# Altium PCB TruckCape for Hammond 1455K - Rev3.PcbDoc
Units mil, origin at the board's own origin, x right, y up, seen from the top; angles counter-clockwise.
Board outline 2952.76 x 4725.19 mil, 2 copper layers (Component Side, Bottom Layer), stack 12.8 mil thick; 37 components, 40 nets, 264 pads, 16 vias.
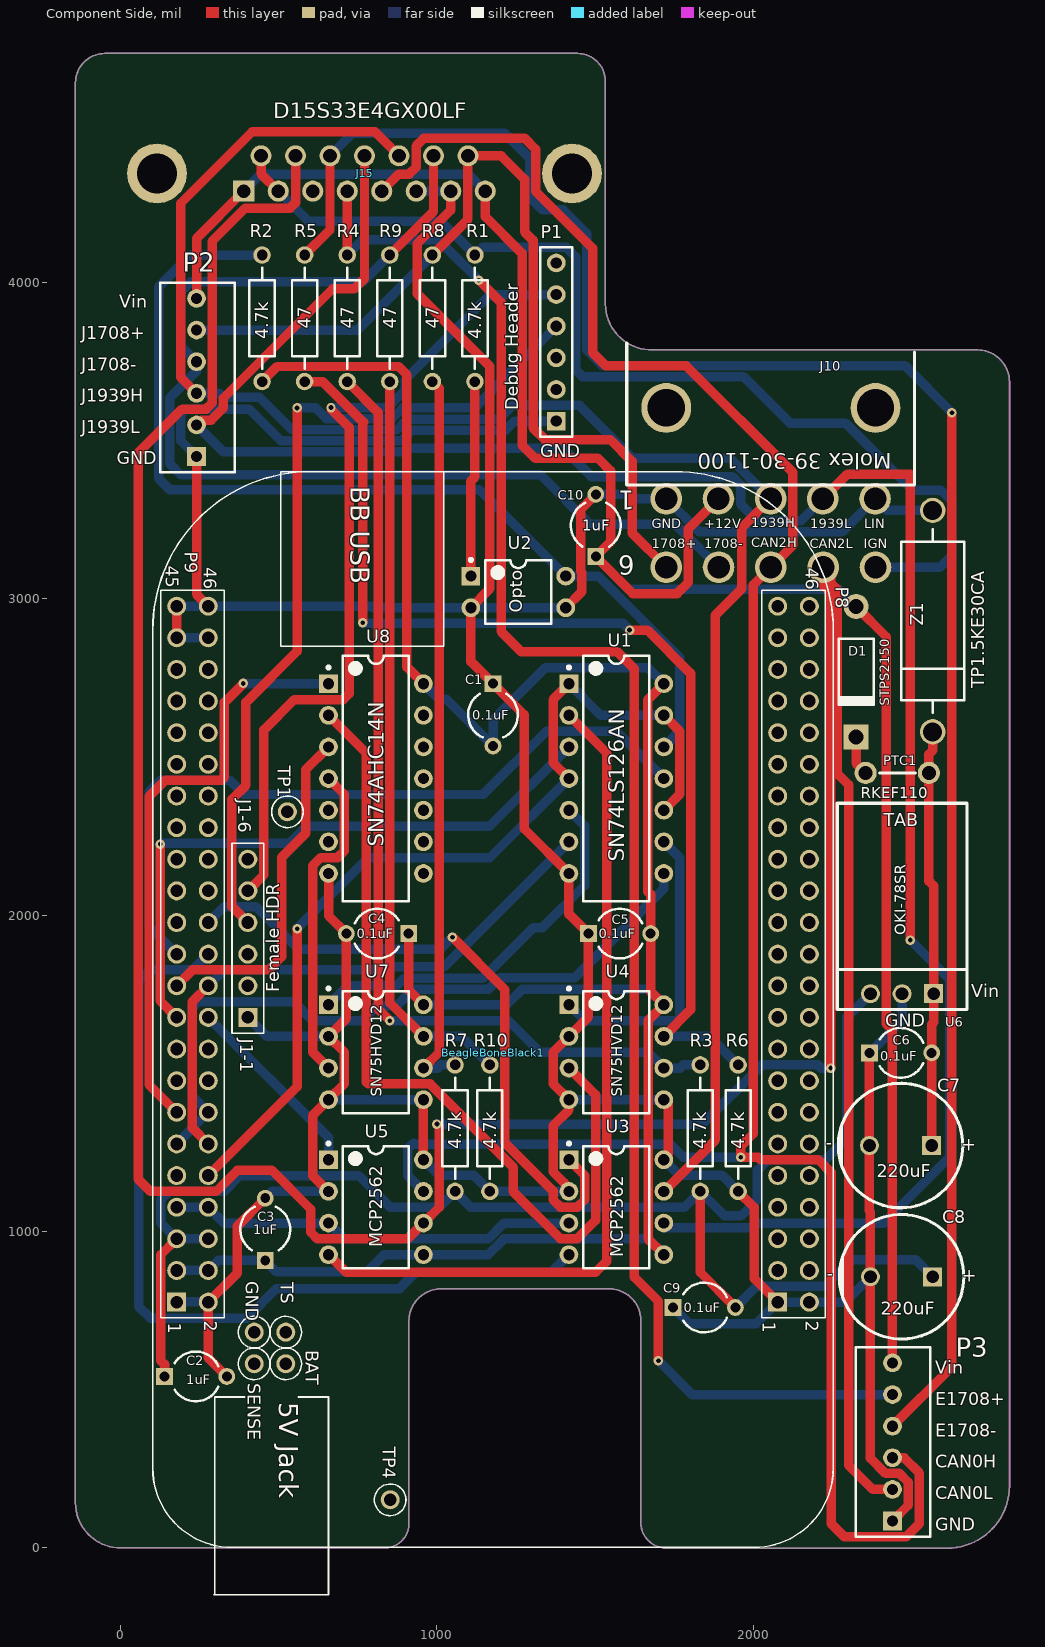
[diagram p0: Component Side view]
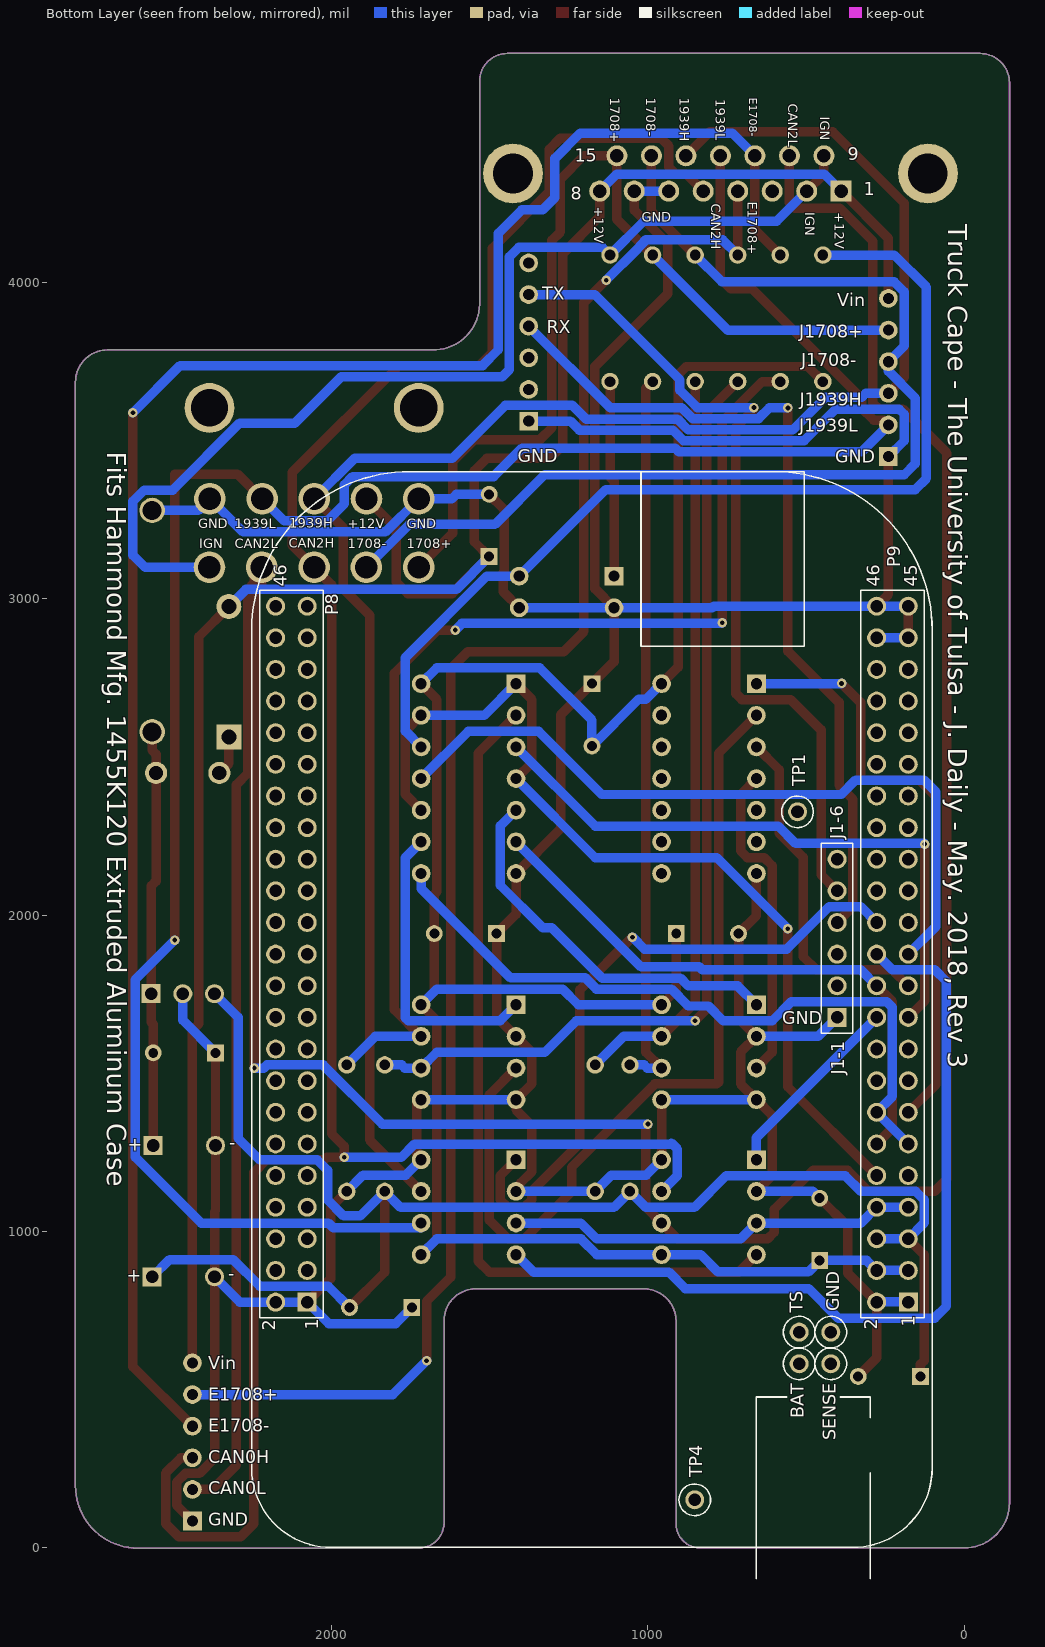
[diagram p1: Bottom Layer view, seen from below]

## Layer stack, top to bottom
Top Solder: solder mask 0.4, Solder Resist, Dk 3.5
Component Side: signal copper 1.4
Dielectric 1: core 10, FR-4, Dk 4.2
Bottom Layer: signal copper 1.4
Solder Side: solder mask 0.4, Solder Resist, Dk 3.5

## Board outline
0.17,0 cw(c0.17,143.03) -142.87,143.03 -142.87,4631.31 cw(c-49.77,4631.31) -49.77,4724.41 1444.44,4724.41 cw(c1444.44,4636.71) 1532.13,4636.71 1532.13,3931.45 1532.15,3931.45 ccw(c1678.95,3933.94) 1681.44,3787.14 1681.45,3787.13 2708.81,3787.13 cw(c2708.5,3685.75) 2809.89,3685.44 2809.89,196.07 cw(c2613.04,196.07) 2613.04,-0.78 1725.78,-0.78 cw(c1725.78,80.77) 1644.23,80.77 1644.23,719.01 ccw(c1544.23,719.01) 1544.23,819.01 1013.23,819.01 ccw(c1013.17,717.07) 911.23,717.13 911.23,76.23 cw(c835,76.23) 835,0

## Design rules (kind name [scope] priority, off if disabled: settings)
Clearance [All] p1: gap=5 ignorepadtopadclearanceinfootprint=FALSE except(0: Arc-Hole Track-Hole SMDPad-Hole THPad-Hole Via-Hole Fill-Hole Poly-Hole Region-Hole Text-Hole)
PolygonConnect [All] p1: connectstyle=Relief reliefconductorwidth=10 reliefentries=4 polygonreliefangle="90 Angle" airgapwidth=10
RoutingVias [All] p1: holewidth=15 width=30 viastyle="Through Hole" minholewidth=13 minwidth=20 maxholewidth=20 maxwidth=30
SolderMaskExpansion [All] p1: expansion=4
Width [All] p1: maxlimit=100 minlimit=10 preferedwidth=30 minimp=50.000000 maximp=50.000000 favimp=50.000000
30 further rules are at their usual default settings.

## Components (designator, comment, footprint, x,y, rotation, side; value= is the part's Value field where it differs from the comment)
BeagleBoneBlack1 "BeagleBoneBlack" Beagleboneblack -332.87,1530.63 r270 top locked
C1 "0.1uF" CAPR5-4X5 1177.13,2633.71 r270 top
C2 "1uF" CAPR5-4X5 237.13,542.13 r0 top
C3 "1uF" CAPR5-4X5 457.13,1007.13 r90 top
C4 "0.1uF" CAPR5-4X5 812.13,1942.13 r180 top
C5 "0.1uF" CAPR5-4X5 1577.13,1942.13 r0 top
C6 "0.1uF" CAPR5-4X5 2465.56,1565 r0 top
C7 "220uF" "Elec. Cap 5 x 10mm" 2563.98,1272.13 r180 top
C8 "220uF" "Elec. Cap 5 x 10mm" 2567.13,857.13 r180 top
C9 "0.1uF" CAPR5-4X5 1845,760 r0 top
C10 "1uF" CAPR5-4X5 1502.13,3232.13 r90 top
D1 "STPS2150" DO-41 2325,2770 r270 top
J10 "10 Pos Mini-Fit Jr." "10 pos Mini-Fit Jr. R/A Header" 1724.82,3316.61 r180 top locked
J15 "Vehicle Interface Cable Connector" DB15 771.91,4401.02 r0 top
P1 "Use this part in J1-1 to J1-6" HDR1X6 1377.13,3562.13 r90 top
P2 "Terminal Block" HDR1X6 240,3450 r90 top
P3 "Terminal Block" HDR1X6 2440,85 r90 top
PTC1 "RKEF110" PTC 2480,2450 r0 top
R1 "4.7k" Axial-0.4 1120,3887.13 r270 top
R2 "4.7k" Axial-0.4 447.13,3887.13 r90 top
R3 "4.7k" Axial-0.4 1832.13,1327.13 r270 top
R4 "47" Axial-0.4 716.28,3887.13 r90 top
R5 "47" Axial-0.4 581.71,3887.13 r90 top
R6 "4.7k" Axial-0.4 1952.13,1327.13 r270 top
R7 "4.7k" Axial-0.4 1057.13,1327.13 r270 top
R8 "47" Axial-0.4 985.43,3887.13 r90 top
R9 "47" Axial-0.4 850.85,3887.13 r90 top
R10 "4.7k" Axial-0.4 1167.13,1327.13 r270 top
U1 "SN74LS126AN" N14A 1567.13,2432.13 r0 top locked
U2 "Opto" DIP-4 1257.13,3022.13 r0 top
U3 "MCP2562" PDIP300-P8 1567.13,1077.13 r0 top locked
U4 "SN75HVD12" PDIP300-P8 1567.13,1567.13 r0 top locked
U5 "MCP2562" PDIP300-P8 807.13,1077.13 r0 top locked
U6 "OKI-78SR" OKI-78SR 2370.28,1752.13 r0 top
U7 "SN75HVD12" PDIP300-P8 807.13,1567.13 r0 top locked
U8 "SN74AHC14N" N14A 807.13,2432.13 r0 top locked
Z1 "TP1.5KE30CA" DIODE-0.7 2567.13,2930 r270 top

## Footprints (in the part's own frame and the unit in brackets; to place one, negate y for a bottom-side part, rotate by r counter-clockwise, add the part's x,y. Pads: shape width x height; smd on the part's side, far side on the other; paste and mask are expansions set on the pad)
"10 pos Mini-Fit Jr. R/A Header" [mil] "Molex 10 position Mini-Fit Jr. Right Angle Header with Pegs, Series 5569"
  round 157.48 hole 118.11: 0(-661.42,-287.4) 0(0,-287.4)
  round 100 hole 71: 1(0,0) 2(-165,0) 3(-330,0) 4(-495,0) 5(-660,0) 6(0,216.53) 7(-165.36,216.53) 8(-330.71,216.53) 9(-496.06,216.53) 10(-661.42,216.53)
  silkscreen extent -785,-491 125,-43
Axial-0.4 [mm] "Axial Device, Thru-Hole; 2 Leads; 0.4 in Pin Spacing"
  round 1.4 hole 0.85: 1(-5.08,0) 2(5.08,0)
  silkscreen extent -4.06,-1.02 4.06,1.02
Beagleboneblack [mil] "Flipped Headers, testpoints and Overlay for a BBB Rev C"
  rect 60x60 hole 40 mask+2: 1(753.5,510) J1-1(-146.5,735) P1(753.5,2410)
  round 60 hole 40 mask+2: 2(753.5,610) 3(653.5,510) 4(653.5,610) 5(553.5,510) 6(553.5,610) 7(453.5,510) 8(453.5,610) 9(353.5,510) 10(353.5,610) 11(253.5,510) 12(253.5,610) 13(153.5,510) 14(153.5,610) 15(53.5,510) 16(53.5,610) 17(-46.5,510) 18(-46.5,610) 19(-146.5,510) 20(-146.5,610) 21(-246.5,510) 22(-246.5,610) 23(-346.5,510) 24(-346.5,610) 25(-446.5,510) 26(-446.5,610) 27(-546.5,510) 28(-546.5,610) 29(-646.5,510) 30(-646.5,610) 31(-746.5,510) 32(-746.5,610) 33(-846.5,510) 34(-846.5,610) 35(-946.5,510) 36(-946.5,610) 37(-1046.5,510) 38(-1046.5,610) 39(-1146.5,510) 40(-1146.5,610) 41(-1246.5,510) 42(-1246.5,610) 43(-1346.5,510) 44(-1346.5,610) 45(-1446.5,510) 46(-1446.5,610) J1-2(-246.5,735) J1-3(-346.5,735) J1-4(-446.5,735) J1-5(-546.5,735) J1-6(-646.5,735) P2(753.5,2510) P3(653.5,2410) P4(653.5,2510) P5(553.5,2410) P6(553.5,2510) P7(453.5,2410) P8(453.5,2510) P9(353.5,2410) P10(353.5,2510) P11(253.5,2410) P12(253.5,2510) P13(153.5,2410) P14(153.5,2510) P15(53.5,2410) P16(53.5,2510) P17(-46.5,2410) P18(-46.5,2510) P19(-146.5,2410) P20(-146.5,2510) P21(-246.5,2410) P22(-246.5,2510) P23(-346.5,2410) P24(-346.5,2510) P25(-446.5,2410) P26(-446.5,2510) P27(-546.5,2410) P28(-546.5,2510) P29(-646.5,2410) P30(-646.5,2510) P31(-746.5,2410) P32(-746.5,2510) P33(-846.5,2410) P34(-846.5,2510) P35(-946.5,2410) P36(-946.5,2510) P37(-1046.5,2410) P38(-1046.5,2510) P39(-1146.5,2410) P40(-1146.5,2510) P41(-1246.5,2410) P42(-1246.5,2510) P43(-1346.5,2410) P44(-1346.5,2510) P45(-1446.5,2410) P46(-1446.5,2510) TP1(-796.5,860) TP4(1378.5,1185) TP5(948.5,855) TP6(948.5,755) TP7(848.5,855) TP8(848.5,755)
  silkscreen extent -1872,434 1678,2586
CAPR5-4X5 [mm] "Capacitor; 2 Leads"
  rect 1.35x1.35 hole 0.8: 1(-2.5,0)
  round 1.35 hole 0.8: 2(2.5,0)
  silkscreen extent -1.69,-2 1.82,2
DB15 [mm]
  rect 1.69x1.69 hole 1.09: 1(-9.72,-2.843)
  round 1.69 hole 1.09: 2(-6.95,-2.843) 3(-4.18,-2.843) 4(-1.41,-2.843) 5(1.36,-2.843) 6(4.13,-2.843) 7(6.9,-2.843) 8(9.67,-2.843) 9(-8.335,-0.003) 10(-5.565,-0.003) 11(-2.795,-0.003) 12(-0.025,-0.003) 13(2.745,-0.003) 14(5.515,-0.003) 15(8.285,-0.003)
  round 4.8 hole 3.18: 16(-16.685,-1.423) 17(16.635,-1.423)
DIODE-0.7 [mil] "Diode, Thru-Hole; 2 Leads; 0.7 in Pin Spacing"
  round 80 hole 60: 1(-350,0) 2(350,0)
  silkscreen extent -290,-100 290,100
DIP-4 [mm] "DIP; 4 Leads; Row Spacing 7.62 mm; Pitch 2.54 mm"
  rect 1.5x1.5 hole 0.9: 1(-3.81,1.27)
  round 1.5 hole 0.9: 2(-3.81,-1.27) 3(3.81,-1.27) 4(3.81,1.27)
  silkscreen extent -3.93,-2.55 2.65,2.69, body extent -3.15,-2.5 3.15,2.5, height 5.6
DO-41 [mm] "Diode, Axial; Body 5.2 x 2.7 mm (LxDia. max), Lead Dia. 0.86 mm (max)"
  round 2 hole 1.2: 1(-5.23,0)
  rect 2x2 hole 1.2: 2(5.23,0)
  silkscreen extent -2.65,-1.4 2.75,1.4
"Elec. Cap 5 x 10mm" [mil] "2 lead polarized Radial Capacitor with 5 mm lead spacing and 10 mm diameter can"
  rect 60x60 hole 40: 1(0,0)
  round 60 hole 40: 2(196.85,0)
  silkscreen extent -98,-197 295,197
HDR1X6 [mm] "Connector; Header; 6 Position"
  rect 1.5x1.5 hole 0.9: 1(0,0)
  round 1.5 hole 0.9: 2(2.54,0) 3(5.08,0) 4(7.62,0) 5(10.16,0) 6(12.7,0)
  silkscreen extent -1.27,-1.27 13.97,1.27
N14A [mm] "DIP, 14-Leads, Row Spacing 7.62mm, Pitch 2.54mm, Body 19.18x6.35mm"
  rect 1.5x1.5 hole 0.9: 1(-3.81,7.62)
  round 1.5 hole 0.9: 2(-3.81,5.08) 3(-3.81,2.54) 4(-3.81,0) 5(-3.81,-2.54) 6(-3.81,-5.08) 7(-3.81,-7.62) 8(3.81,-7.62) 9(3.81,-5.08) 10(3.81,-2.54) 11(3.81,0) 12(3.81,2.54) 13(3.81,5.08) 14(3.81,7.62)
  silkscreen extent -3.93,-9.85 2.65,9.85, body extent -3.55,-9.85 3.55,9.85, height 5.08
OKI-78SR [mil] "Horizontal Mount SIP DC/DC Converter"
  rect 60x60 hole 40: 1(200,0)
  round 60 hole 40: 2(100,0) 3(0,0)
  silkscreen extent -105,-50 305,602
PDIP300-P8 [mm] "DIP, 8-Leads, Row Spacing 7.62mm, Pitch 2.54mm, Body 9.5x6.6mm"
  rect 1.5x1.5 hole 0.9: 1(-3.81,3.81)
  round 1.5 hole 0.9: 2(-3.81,1.27) 3(-3.81,-1.27) 4(-3.81,-3.81) 5(3.81,-3.81) 6(3.81,-1.27) 7(3.81,1.27) 8(3.81,3.81)
  silkscreen extent -3.93,-4.9 2.65,5.23, body extent -3.55,-4.9 3.55,4.9, height 4.32
PTC [mil] "TE RGEF600-2"
  round 70 hole 45: 1(-125,0) 2(75,0)
  silkscreen extent -80,0 33,0

## Part data
BeagleBoneBlack1: "46 Positions Header, Breakaway Connector 0.100\" (2.54mm) Through Hole Tin", Manufacturer="Sullins Connector Solutions", PartNumber=PREC023DAAN-RC, Supplier Part Number 1=S2012EC-23-ND, Supplier 1=Digi-Key
C1 C4 C5 C6 C9: library part Cap, "CAP CER 0.1UF 100V X7R RADIAL", Manufacturer="Vishay BC Components", PartNumber=K104K20X7RH53H5, Supplier Part Number 1=BC5139-ND, Supplier 1=Digi-Key
C2 C3 C10: library part Cap, "CAP CER 1UF 100V X7R RADIAL", Manufacturer="Murata Electronics North America", PartNumber=RDER72A105K2M1H03A, Supplier Part Number 1=490-9198-1-ND, Supplier 1=Digi-Key
C7 C8: library part "Electrolytic Cap", "220µF 50V Aluminum Electrolytic Capacitors Radial, Can 175 mOhm @ 10kHz 5000 Hrs @ 105°C", Manufacturer="EPCOS (TDK)", PartNumber=B41858C6227M000, Supplier Part Number 1=495-6000-ND, Supplier 1=Digi-Key
D1: library part "Diode 1N4003", "Diode Schottky 150V 2A Through Hole DO-15", Manufacturer=STMicroelectronics, Supplier Part Number 1=497-3213-1-ND, PartNumber=STPS2150, Supplier 1=Digi-Key
J10: library part "10 Pos Header", "10 Positions Header Connector 0.165\" (4.20mm) Through Hole, Right Angle Tin", Manufacturer=Molex, PartNumber=39-30-1100, Supplier Part Number 1=WM1355-ND, Supplier 1=Digi-Key
J15: library part 788781-2, "Receptacle Assembly, 15 Position, Right Angle, 8.08mm Series, Amplimite, with Screwlocks", Manufacturer="Amphenol FCI", PartNumber=D15S33E4GX00LF, Supplier Part Number 1=609-1499-ND, Supplier 1=Digi-Key
P1: library part "Header 6", "CONN HEADER FEMALE 6POS .1\" GOLD", Manufacturer="Sullins Connector Solutions", PartNumber=PPPC061LFBN-RC, Supplier Part Number 1=S7039-ND, Supplier 1=Digi-Key
P2 P3: library part "Header 6", "6 Position Wire to Board Terminal Block Horizontal with Board 0.100\" (2.54mm) Through Hole", Manufacturer="TE Connectivity AMP Connectors", PartNumber=282834-6, Supplier Part Number 1=A98337-ND, Supplier 1=Digi-Key
PTC1: library part "SMD Resistor", "Polymeric PTC Resettable Fuse 60V 1.1A Ih Through Hole Radial, Disc", Manufacturer="Littelfuse Inc.", Supplier Part Number 1=RKEF110HF-ND, PartNumber=RKEF110, Supplier 1=Digi-Key
R1 R2 R3 R6 R7 R10: library part "Chip Resistor", "RES SMD 4.7K OHM 1% 1/10W 0603", Manufacturer=Yageo, PartNumber=CFR-25JB-52-4K7, Supplier Part Number 1=4.7KQBK-ND, Supplier 1=Digi-Key
R4 R5 R8 R9: library part "Chip Resistor", "47 Ohms ±5% 0.25W, 1/4W Through Hole Resistor Axial  Carbon Film", Manufacturer=Yageo, PartNumber=CFR-25JB-52-47R, Supplier Part Number 1=47QBK-ND, Supplier 1=Digi-Key
U1: library part DM74LS126AN, "Quad 3-State Buffer", Manufacturer="Texas Instruments", Supplier Part Number 1=296-3643-5-ND, ComponentLink1Description="Manufacturer Link", ComponentLink1URL=http://www.fairchildsemi.com/, DatasheetVersion=Mar-1998, LatestRevisionDate=29-May-2009, LatestRevisionNote="Component Body Added.", PackageDescription="DIP, 14-Pin, Row Spacing 7.62 mm, Pitch 2.54 mm", PackageReference=N14A, PackageVersion=2000, PartNumber=SN74LS126AN, Published=17-Jul-2002, Publisher="Altium Limited", Supplier 1=Digi-Key
U2: library part Optoisolator1, "4-Pin Phototransistor Optocoupler", DatasheetVersion=Nov-2003, LatestRevisionDate=04-Mar-2005, LatestRevisionNote="Sch pins 3 & 4 Swapped.", PackageReference=DIP-4, Published=24-Mar-1999, Publisher="Altium Limited"
U3 U5: library part SN65HVD232DR, "1/1 Transceiver Half CAN 8-PDIP", Drivers Per Package=1, Manufacturer="Microchip Technology", PartNumber=MCP2562-E/P, Rating=Catalog, Supplier Part Number 1=MCP2562-E/P-ND, Supply Voltage(s)(V)=3.3, Code_JEDEC=MS-012AA, ComponentLink1Description=Datasheet, ComponentLink1URL=http://www.ti.com/general/docs/lit/getliterature.tsp?genericPartNumber=SN65HVD232&fileType=pdf, DatasheetVersion=SLOS346K, Eco-Plan="Green (RoHS & no Sb/Br)", ICC(Max)(mA)=17, Isolated=No, Mounting Technology="Surface Mount", PackageDescription="8-Pin Plastic Small Outline Integrated Circuit, 4.9 x 3.9 mm, Pitch 1.27 mm Pitch", PackageReference=D8, PackageVersion="revM, Jun-2011", Receivers Per Package=1, SubFamily=CAN, Supplier 1=Digi-Key, Supplier 2=Digi-Key, Supplier 3=Digi-Key, Supplier 4=Newark, Supplier 5=Mouser, Supplier Part Number 2=296-26344-1-ND, Supplier Part Number 3=296-26344-6-ND, Supplier Part Number 4=75C7753, Supplier Part Number 5=595-SN65HVD232DR, Transient Pulse Protection(V)="-25 to 25"
U4 U7: library part "SN75HVD12D (3.3v RS485)", "IC 3.3V DIFF TXRX 8-SOIC", Manufacturer="Texas Instruments", PartNumber=SN75HVD12P, Supplier 1=Digi-Key, Supplier Part Number 1=SN75HVD12P
U6: library part 7805, "5V DC/DC Converter (7805 replacement)", Manufacturer="Murata Power Solutions Inc.", PartNumber=OKI-78SR-5/1.5-W36H-C, Supplier Part Number 1=811-2692-ND, Supplier 1=Digi-Key, Supplier 2=Digi-Key, Supplier Part Number 2=811-2692-ND
U8: library part "74VHC14 Hex Inverter", "Inverter IC 6 Channel Schmitt Trigger 14-PDIP", Manufacturer="Texas Instruments", Supplier Part Number 1=296-4550-5-ND, PartNumber=SN74AHC14N, Supplier 1=Digi-Key
Z1: library part Zener, "TVS DIODE 25.6V 41.4V DO201", Manufacturer="Littelfuse Inc.", Supplier Part Number 1=F7610CT-ND, PartNumber=TP1.5KE30CA, Supplier 1=Digi-Key

## Via types
v1: diameter 30, hole 15, Component Side to Bottom Layer, 16 vias

## Nets (pads, with @x,y where several pads share a name; then routed paths per layer and width w, separated by ;. In a path a pad name is that pad's centre, name@x,y a point inside that pad or via, vN(x,y) a via of type N, cw(c..) or ccw(c..) an arc to the next point about the centre after c; other vN are vias at no path point)
3V3: BeagleBoneBlack1.3 BeagleBoneBlack1.4 C1.2 C3.1 C4.1 C5.2 R2.1 U1.14 U3.5 U4.8 U5.5 U7.8 U8.14 | length 7063.2
  Component Side w30: R2.1 494.76,3734.76 878.98,3734.76 904.98,3708.76 904.98,2784.28 U8.14 ; C4.1 910.56,1763.71 U7.8 ; U3.5 1667.61,976.66 1667.61,1667.6 U4.8 1675.56,1758.71 C5.2 1675.56,2065.76 1666.98,2074.34 1666.98,2681.98 U1.14
  Bottom Layer w30: BeagleBoneBlack1.3 BeagleBoneBlack1.4 308.71,908.71 C3.1 493.08,872.76 778.98,872.76 833.35,927.13 U5.5 1161.98,927.13 1211.61,976.76 1667.5,976.76 U3.5 ; U7.8 1220.48,1717.13 1270.11,1766.76 1667.5,1766.76 U4.8 ; U8.14 1006.5,2682.76 1029.65,2682.76 C1.2 1177.13,2616.91 1341.98,2781.76 1667.51,2781.76 U1.14
5V0: BeagleBoneBlack1.5 BeagleBoneBlack1.6 C2.1 C8.1 C9.2 R3.2 R7.2 U6.3 | length 4808.1
  Component Side w30: C2.1 138.71,580.04 126.98,591.76 126.98,926.98 BeagleBoneBlack1.5 ; R3.2 1832.13,871.29 C9.2
  Bottom Layer w30: BeagleBoneBlack1.6 BeagleBoneBlack1.5 126.98,1027.28 126.98,1100.76 153.35,1127.13 326.98,1127.13 376.61,1176.76 752.98,1176.76 852.98,1076.76 1006.76,1076.76 R7.2 1107.5,1076.76 1781.76,1076.76 R3.2 1909.5,1049.76 1961.98,1049.76 2012.98,1100.76 2012.98,1194.13 2045.98,1227.13 2227.98,1227.13 2295.98,1295.13 2295.98,1677.83 U6.3 ; C9.2 2010.56,827.13 2226.98,827.13 2311.61,911.76 2512.5,911.76 C8.1
12V0: C6.2 C7.1 PTC1.2 U6.1 Z1.2 | length 1321.8
  Component Side w30: C7.1 C6.2 2563.98,1654.76 2570.28,1661.06 U6.1 2570.28,2092.76 2555,2108.04 PTC1.2 2555,2508.76 2567.13,2520.9 Z1.2
CAN2H: J10.8 J15.5 P3.3 U5.7 | length 7578.3
  Component Side w30: J15.5 879.1,4342.76 911.98,4342.76 933.98,4364.76 933.98,4431.76 957.98,4455.76 1277.98,4455.76 1311.98,4421.76 1311.98,4288.76 1491.98,4108.76 1491.98,3778.76 1533.98,3736.76 1787.98,3736.76 2124.98,3399.76 2124.98,3169.53 J10.8 1999.98,3044.53 1999.98,1309.39 1960,1269.41 v1(1960,1235) 2015.11,1235 2022.98,1227.13 2205.98,1227.13 2245.98,1187.13 2245.98,76.76 2287.98,34.76 2482.98,34.76 2524.98,76.76 2524.98,236.76 2476.74,285 P3.3
  Bottom Layer w30: U5.7 906.98,1177.28 906.98,1260.76 925.98,1279.76 929.08,1276.66 1737.65,1276.66 1779.31,1235 v1(1960,1235)
CAN2L: J10.9 J15.10 P3.2 U5.6 | length 10966.2
  Component Side w30: J15.10 552.8,4252.76 535.8,4235.76 393.98,4235.76 289.53,4131.31 289.53,3619.55 269.98,3600 194.22,3600 55,3460.78 55,1166.11 93.98,1127.13 302.35,1127.13 368.98,1193.76 477.98,1193.76 600.98,1070.76 600.98,997.76 621.98,976.76 906.76,976.76 U5.6 1006.98,1076.98 1006.98,1333.02 v1(1000,1340) ; v1(2245,1517.13) 2245,3017.74 2220.88,3041.86 J10.9 2245,3075.96 2245,3050 2264.98,3030.02 2264.98,2448.76 2300.98,2412.76 2300.98,261.59 2377.57,185 P3.2
  Bottom Layer w30: v1(1000,1340) 1839.85,1340 2026.98,1527.13 2204.35,1527.13 2214.35,1517.13 v1(2245,1517.13)
DEBUGRX: BeagleBoneBlack1.J1-4 P1.4 | length 2687
  Component Side w30: BeagleBoneBlack1.J1-4 351.98,2027.28 351.98,2366.76 395.98,2410.76 395.98,2672.76 557.71,2834.49 v1(557.71,3603.76)
  Bottom Layer w30: v1(557.71,3603.76) 616.74,3603.76 650.5,3570 858.72,3570 892.48,3603.76 1118.76,3603.76 P1.4
DEBUGTX: BeagleBoneBlack1.J1-5 P1.5 | length 2653.6
  Component Side w30: BeagleBoneBlack1.J1-5 452.98,2127.98 452.98,2585.76 548.98,2681.76 702.98,2681.76 721.98,2700.76 721.98,3542.76 665,3599.74 v1(665,3605)
  Bottom Layer w30: v1(665,3605) 844.22,3605 898.98,3659.76 898.98,3692.76 1168.35,3962.13 P1.5
EJ1708+: J15.4 P3.5 R4.2 | length 5303.7
  Component Side w30: R4.2 716.28,4187.76 716.38,4187.86 J15.4 ; v1(1131.98,4007.76) 1202.56,3937.18 1202.56,2897.18 1265.98,2833.76 1568.98,2833.76 1623.98,2778.76 1623.98,855.76 1699.98,779.76 v1(1699.98,591.76)
  Bottom Layer w30: R4.2 763.91,4134.76 1006.98,4134.76 1032.98,4106.76 v1(1131.98,4007.76) ; v1(1699.98,591.76) 1806.74,485 P3.5
EJ1708-: J15.11 P3.4 R5.2 | length 6278.9
  Component Side w30: R5.2 661.85,4167.27 J15.11 ; P3.4 2627.98,572.98 v1(2627.98,3588.76)
  Bottom Layer w30: J15.11 733.71,4472.76 1213.98,4472.76 1293.98,4392.76 1293.98,4268.76 1332.98,4229.76 1398.98,4229.76 1473.18,4155.57 1473.18,3787.57 1522.98,3737.76 2478.98,3737.76 v1(2627.98,3588.76)
GND: BeagleBoneBlack1.1 BeagleBoneBlack1.2 BeagleBoneBlack1.43 BeagleBoneBlack1.44 BeagleBoneBlack1.45 BeagleBoneBlack1.46 BeagleBoneBlack1.J1-1 BeagleBoneBlack1.P1 BeagleBoneBlack1.P2 C1.1 C2.2 C3.2 C4.2 C5.1 C6.1 C7.2 C8.2 C9.1 C10.2 J10.1 J10.5 J15.6 J15.7 P1.1 P2.1 P3.1 R6.2 R10.2 U1.7 U2.2 U2.3 U3.2 U3.8 U4.2 U4.4 U4.5 U5.2 U5.8 U6.2 U7.2 U7.4 U7.5 U8.7 Z1.1 | length 15674.2
  Component Side w30: BeagleBoneBlack1.43 BeagleBoneBlack1.45 ; P2.1 240,3014.27 BeagleBoneBlack1.46 ; C2.2 277.13,600.56 BeagleBoneBlack1.2 367.98,867.98 367.98,1016.41 C3.2 ; U5.2 606.98,1177.28 606.98,1366.98 U7.4 706.98,1466.98 706.98,1567.28 U7.2 713.71,1673.71 C4.2 657.13,1998.71 U8.7 ; U5.8 U7.5 ; J15.7 1043.54,4229.32 936.98,4122.76 936.98,3965.34 1167.56,3734.76 1167.56,3032.56 U2.2 1107.13,2802.13 C1.1 1275.98,2633.28 1275.98,2273.29 U1.7 1417.13,2003.71 C5.1 1478.71,1678.71 U4.2 1366.98,1566.98 1366.98,1467.28 U4.4 1417.13,1384.91 1367.61,1335.39 1367.61,1188.76 1401.98,1154.39 U3.2 ; U2.3 1456.98,3021.98 1456.98,3084.76 1454.98,3086.76 1454.98,3283.4 C10.2 ; U3.8 1730.88,1240.87 1730.88,1403.39 U4.5 ; R6.2 2002.98,1076.28 2002.98,851.28 BeagleBoneBlack1.P1 ; C6.1 C7.2 2367.13,1065.91 2370.28,1062.76 C8.2 2370.28,283.46 2418.27,235.47 2461.98,235.47 2489.98,207.47 2489.98,134.98 P3.1
  Bottom Layer w30: BeagleBoneBlack1.1 178.05,778.04 276.22,778.04 BeagleBoneBlack1.2 ; BeagleBoneBlack1.43 BeagleBoneBlack1.44 ; BeagleBoneBlack1.45 BeagleBoneBlack1.46 791.98,2977.13 796.98,2972.13 U2.2 U2.3 ; P2.1 189.98,3500.02 189.98,3583.76 205.98,3599.76 406.98,3599.76 506.74,3500 887.71,3500 921.47,3533.76 1216.91,3533.76 1245.28,3562.13 P1.1 ; BeagleBoneBlack1.J1-1 462.13,1617.13 U7.2 ; C3.2 478.71,1127.13 U5.2 ; U7.4 U7.5 ; J15.6 J15.7 ; U5.8 1005.5,1178.76 1115.5,1178.76 R10.2 U3.2 ; U4.4 U4.5 ; C10.2 1605.98,3330.56 1619.93,3316.61 J10.1 1829.82,3211.61 2279.82,3211.61 J10.5 2421.43,3280 Z1.1 ; U3.8 1765.5,1178.76 1900.5,1178.76 R6.2 ; C9.1 1797.81,708.76 2008.76,708.76 BeagleBoneBlack1.P1 BeagleBoneBlack1.P2 2290.28,777.13 C8.2 ; C6.1 2470.28,1668.15 U6.2
IGNITION: J10.10 J15.2 J15.9 R1.1 | length 3327.9
  Component Side w30: J15.9 443.74,4343.62 J15.2
  Bottom Layer w30: J15.2 593.6,4193.76 1013.37,4193.76 R1.1 1144.63,4111.76 1407.98,4111.76 1437.98,4081.76 1437.98,3724.76 1459.98,3702.76 1968.98,3702.76 2115.98,3555.76 2290.98,3555.76 2502.98,3343.76 2592.98,3343.76 2627.98,3308.76 2627.98,3138.08 2589.98,3100.08 J10.10
J1708+: J10.6 J15.15 P2.5 R8.2 | length 2947.1
  Component Side w30: R8.2 1098.07,4199.78 J15.15 1202.84,4400.91 1276.98,4326.76 1276.98,4160.24 1303.98,4133.24 1303.98,3540.76 1340.98,3503.76 1547.98,3503.76 1616.98,3434.76 1616.98,3207.91 J10.6
  Bottom Layer w30: P2.5 748.29,3850 R8.2
J1708-: J10.7 J15.14 P2.4 R9.2 | length 3549.9
  Component Side w30: R9.2 989.02,4225.29 J15.14
  Bottom Layer w30: R9.2 766.48,4002.76 221.98,4002.76 189.98,3970.76 189.98,3800.02 P2.4 240,3720.04 154.98,3635.03 154.98,3427.76 189.98,3392.76 1326.98,3392.76 1483.98,3235.76 1754.49,3235.76 J10.7
J1939H: J10.3 J15.13 P2.3 U3.7 | length 5782.3
  Component Side w30: P2.3 189.98,3700.02 189.98,4250.76 415.98,4476.76 804.1,4476.76 J15.13 ; U3.7 1879.98,1289.98 1879.98,2948.76 1962.98,3031.76 1962.98,3224.78 J10.3
  Bottom Layer w30: P2.3 311.52,3650 323.76,3637.76 438.98,3637.76 541.74,3535 873.21,3535 906.98,3568.76 1195.8,3568.76 1238.8,3611.76 1450.98,3611.76 1618.51,3444.23 1927.19,3444.23 J10.3
J1939L: J10.4 J15.12 P2.2 U3.6 | length 6839
  Component Side w30: P2.2 255,3565 285.98,3565 324.53,3603.55 324.53,3634.53 670.69,3980.69 738.83,3980.69 770.91,4012.76 J15.12 ; J10.4 2297.97,3394.76 2494.98,3394.76 2495.98,3393.76 v1(2495.98,1921.76)
  Bottom Layer w30: P2.2 325,3465 902.21,3465 913.97,3476.76 1397.98,3476.76 1488.13,3386.61 1933.98,3386.61 1959.98,3360.61 1959.98,3300.61 2013.98,3246.61 2149.82,3246.61 J10.4 ; U3.6 1717.13,1011.76 1994.61,1011.76 2009.98,1027.13 2412.35,1027.13 2620.98,1235.76 2620.98,1796.76 v1(2495.98,1921.76)
NetBeagleBoneBlack1_9: BeagleBoneBlack1.9
NetBeagleBoneBlack1_10: BeagleBoneBlack1.10 U1.1 U1.4 U1.10 U1.13 | length 2976.9
  Component Side w30: BeagleBoneBlack1.10 557.98,1457.98 v1(557.98,1957.76) ; U1.4 1366.98,2482.29 1366.98,2681.98 U1.1 ; U1.10 1766.98,2381.98 1766.98,2582.29 U1.13
  Bottom Layer w30: v1(557.98,1957.76) 781.98,2181.76 1166.76,2181.76 U1.4 ; U1.1 1517.13,2632.13 U1.13
NetBeagleBoneBlack1_11: BeagleBoneBlack1.11 BeagleBoneBlack1.14 U1.8 | length 2237
  Bottom Layer w30: BeagleBoneBlack1.11 177.13,1277.28 BeagleBoneBlack1.14@277.06,1377.21 ; BeagleBoneBlack1.14 BeagleBoneBlack1.14@277.06,1377.21 ; U1.8 1717.13,2084.61 1434.29,1801.76 1197.98,1801.76 1162.88,1766.66 925.98,1766.66 872.5,1713.18 808.83,1713.18 762.41,1666.76 606.98,1666.76 546.61,1727.13 245.5,1727.13 227.13,1708.76 227.13,1427.13 BeagleBoneBlack1.14@277.06,1377.21
NetBeagleBoneBlack1_12: BeagleBoneBlack1.12 BeagleBoneBlack1.22 U1.6 | length 1869.9
  Component Side w30: BeagleBoneBlack1.12 227.13,1327.13 227.13,1727.13 BeagleBoneBlack1.22
  Bottom Layer w30: BeagleBoneBlack1.22 327.13,1827.13 828.08,1827.13 837.61,1836.66 1021.66,1836.66 U1.6
NetBeagleBoneBlack1_13: BeagleBoneBlack1.13 U8.1 | length 1888.8
  Component Side w30: BeagleBoneBlack1.13 90,1464.27 90,2375.78 141.35,2427.13 319.35,2427.13 327.98,2435.76 327.98,2672.76 v1(387.98,2732.76)
  Bottom Layer w30: v1(387.98,2732.76) 388.61,2732.13 U8.1
NetBeagleBoneBlack1_19: BeagleBoneBlack1.19 U1.3 | length 1988.8
  Component Side w30: v1(125,2225) 125,1729.27 BeagleBoneBlack1.19
  Bottom Layer w30: v1(125,2225) 127.13,2227.13 533.61,2227.13 588.24,2281.76 1166.76,2281.76 U1.3
NetBeagleBoneBlack1_20: BeagleBoneBlack1.20 U5.1 | length 607.4
  Bottom Layer w30: BeagleBoneBlack1.20 657.13,1297.13 U5.1
NetBeagleBoneBlack1_21: BeagleBoneBlack1.21 U8.3 | length 1094.5
  Component Side w30: BeagleBoneBlack1.21 227.13,1827.13 467.35,1827.13 508.98,1868.76 508.98,2182.76 584.92,2258.7 584.92,2459.92 U8.3
NetBeagleBoneBlack1_23: BeagleBoneBlack1.23 U1.11 | length 2355.2
  Bottom Layer w30: BeagleBoneBlack1.23 90,1964.27 90,2390.15 126.98,2427.13 343.61,2427.13 388.98,2381.76 1145.98,2381.76 1345.98,2581.76 1567.51,2581.76 U1.11
NetBeagleBoneBlack1_24: BeagleBoneBlack1.24 U3.4 | length 2741.7
  Bottom Layer w30: BeagleBoneBlack1.24 227.13,1827.13 92.87,1827.13 56.98,1791.24 56.98,763.76 93.98,726.76 398.98,726.76 491.98,819.76 881.98,819.76 933.98,871.76 1361.76,871.76 U3.4
NetBeagleBoneBlack1_26: BeagleBoneBlack1.26 U3.1 | length 2092
  Component Side w30: v1(1048.98,1930.76) 1214.98,1764.76 1214.98,1280.6 1366.98,1128.61 1366.98,1100.61 1389.98,1077.6 1443.82,1077.6 1466.98,1100.76 1466.98,1177.28 U3.1
  Bottom Layer w30: BeagleBoneBlack1.26 327.13,2027.13 427.61,2027.13 561.98,1892.76 1010.98,1892.76 v1(1048.98,1930.76)
NetD1_2: D1.2 PTC1.1 | length 126.5
  Component Side w30: D1.2 2325,2480 PTC1.1
NetR1_2: R1.2 U2.1 | length 620.3
  Component Side w30: U2.1 1107.13,3372.76 1120,3385.63 R1.2
NetR2_2: R2.2 U1.12 U2.4 | length 3158.9
  Bottom Layer w30: R2.2 221.35,4087.13 119.98,3985.76 119.98,3380.76 154.98,3345.76 1133.5,3345.76 U2.4 1509.61,3072.13 1766.98,2814.76 1766.98,2581.98 U1.12
NetR3_1: R3.1 R4.1 U4.6 | length 3123.4
  Component Side w30: R4.1 813.98,3589.43 813.98,1703.76 v1(850.98,1666.76)
  Bottom Layer w30: v1(850.98,1666.76) 1225.98,1666.76 1325.98,1566.76 1667.5,1566.76 U4.6 1768.98,1517.13 1778.98,1527.13 R3.1
NetR5_1: R5.1 R6.1 U4.7 | length 3432.3
  Component Side w30: R5.1 638.61,3687.13 767.98,3557.76 765,3554.78 v1(765,2925) ; v1(1608.98,2901.76) 1664.98,2901.76 1801.98,2764.76 1801.98,1701.98 U4.7
  Bottom Layer w30: v1(765,2925) 767.4,2922.6 1588.14,2922.6 v1(1608.98,2901.76) ; U4.7 1862.13,1617.13 R6.1
NetR7_1: R7.1 R8.1 U7.6 | length 2303.7
  Component Side w30: U7.6 1006.98,1566.98 1006.98,3665.58 R8.1
  Bottom Layer w30: U7.6 1001.98,1517.13 1011.98,1527.13 R7.1
NetR9_1: R9.1 R10.1 U7.7 | length 2361.3
  Component Side w30: R9.1 850.85,1723.41 U7.7
  Bottom Layer w30: U7.7 1077.13,1617.13 R10.1
NetU1_2: U1.2 U5.4 | length 2692.3
  Component Side w30: U5.4 712.5,871.76 1501.98,871.76 1536.98,906.76 1536.98,2512.29 U1.2
NetU1_5: U1.5 U7.1 | length 1224.3
  Bottom Layer w30: U7.1 716.76,1776.76 872.61,1776.76 897.5,1801.66 1145.3,1801.66 1304.66,1961.02 1333.24,1961.02 1466.98,2094.76 1466.98,2282.29 U1.5
NetU1_9: U1.9 U4.1 | length 951.5
  Bottom Layer w30: U4.1 1467.5,1666.76 1757.98,1666.76 1766.98,1675.76 1766.98,2182.29 U1.9
NetU4_3: U4.3 U8.2 | length 2724.4
  Component Side w30: U8.2 776.98,2512.28 776.98,1472.76 782.98,1466.76 977.98,1466.76 1240.76,1203.98 1240.76,1126.83 1389.98,977.6 1442.97,977.6 1501.98,1036.62 1501.98,1432.28 U4.3
NetU7_3: U7.3 U8.4 | length 1028.7
  Component Side w30: U7.3 606.98,1567.28 606.98,2156.76 632.82,2182.6 685.98,2182.6 706.66,2203.28 706.66,2382.6 U8.4
RAW: C10.1 D1.1 J10.2 J15.1 J15.8 P2.6 P3.6 | length 6650.4
  Component Side w30: P2.6 240,4139.88 J15.1 ; J15.8 1152.6,4208.62 1268.98,4092.24 1268.98,3485.76 1309.98,3444.76 1508.98,3444.76 1548.98,3404.76 1548.98,3180.55 C10.1 1619.08,3016.76 1758.98,3016.76 1794.98,3052.76 1794.98,3221.78 J10.2 ; D1.1 2420.28,2880.62 2420.28,1656.76 2440,1637.04 P3.6
  Bottom Layer w30: J15.1 442.88,4342.76 1098.93,4342.76 J15.8 ; C10.1 1605.84,3030 2270.91,3030 D1.1
"SYS 5V": BeagleBoneBlack1.7 BeagleBoneBlack1.8 U3.3 U5.3 | length 1302.4
  Bottom Layer w30: BeagleBoneBlack1.7 BeagleBoneBlack1.8 327.13,1027.13 U5.3 707.5,976.76 1161.98,976.76 1212.35,1027.13 U3.3
pads on no net: BeagleBoneBlack1.15 BeagleBoneBlack1.16 BeagleBoneBlack1.17 BeagleBoneBlack1.18 BeagleBoneBlack1.25 BeagleBoneBlack1.27 BeagleBoneBlack1.28 BeagleBoneBlack1.29 BeagleBoneBlack1.30 BeagleBoneBlack1.31 BeagleBoneBlack1.32 BeagleBoneBlack1.33 BeagleBoneBlack1.34 BeagleBoneBlack1.35 BeagleBoneBlack1.36 BeagleBoneBlack1.37 BeagleBoneBlack1.38 BeagleBoneBlack1.39 BeagleBoneBlack1.40 BeagleBoneBlack1.41 BeagleBoneBlack1.42 BeagleBoneBlack1.J1-2 BeagleBoneBlack1.J1-3 BeagleBoneBlack1.J1-6 BeagleBoneBlack1.P3 BeagleBoneBlack1.P4 BeagleBoneBlack1.P5 BeagleBoneBlack1.P6 BeagleBoneBlack1.P7 BeagleBoneBlack1.P8 BeagleBoneBlack1.P9 BeagleBoneBlack1.P10 BeagleBoneBlack1.P11 BeagleBoneBlack1.P12 BeagleBoneBlack1.P13 BeagleBoneBlack1.P14 BeagleBoneBlack1.P15 BeagleBoneBlack1.P16 BeagleBoneBlack1.P17 BeagleBoneBlack1.P18 BeagleBoneBlack1.P19 BeagleBoneBlack1.P20 BeagleBoneBlack1.P21 BeagleBoneBlack1.P22 BeagleBoneBlack1.P23 BeagleBoneBlack1.P24 BeagleBoneBlack1.P25 BeagleBoneBlack1.P26 BeagleBoneBlack1.P27 BeagleBoneBlack1.P28 BeagleBoneBlack1.P29 BeagleBoneBlack1.P30 BeagleBoneBlack1.P31 BeagleBoneBlack1.P32 BeagleBoneBlack1.P33 BeagleBoneBlack1.P34 BeagleBoneBlack1.P35 BeagleBoneBlack1.P36 BeagleBoneBlack1.P37 BeagleBoneBlack1.P38 BeagleBoneBlack1.P39 BeagleBoneBlack1.P40 BeagleBoneBlack1.P41 BeagleBoneBlack1.P42 BeagleBoneBlack1.P43 BeagleBoneBlack1.P44 BeagleBoneBlack1.P45 BeagleBoneBlack1.P46 BeagleBoneBlack1.TP1 BeagleBoneBlack1.TP4 BeagleBoneBlack1.TP5 BeagleBoneBlack1.TP6 BeagleBoneBlack1.TP7 BeagleBoneBlack1.TP8 J10.0 J15.3 J15.16 J15.17 P1.2 P1.3 P1.6 U8.5 U8.6 U8.8 U8.9 U8.10 U8.11 U8.12 U8.13

## Keep-outs
Keep-Out Layer:
  lines w5: 1532.15,3931.45 ccw(c1678.95,3933.94) 1681.44,3787.14 1681.45,3787.13 2708.81,3787.13 cw(c2708.5,3685.75) 2809.89,3685.44 2809.89,196.07 cw(c2613.04,196.07) 2613.04,-0.78 1725.78,-0.78 cw(c1725.78,80.77) 1644.23,80.77 1644.23,719.01 ccw(c1544.23,719.01) 1544.23,819.01 1013.23,819.01 ccw(c1013.17,717.07) 911.23,717.13 911.23,76.23 cw(c835,76.23) 835,0 0.17,0 cw(c0.17,143.03) -142.87,143.03 -142.87,4631.31 cw(c-49.77,4631.31) -49.77,4724.41 1444.44,4724.41 cw(c1444.44,4636.71) 1532.13,4636.71 1532.13,3931.45 ; 1532.13,3931.45 1532.15,3931.45

## Silkscreen, mask and mechanical layers (free items; w line width, h text height)
Top Overlay:
  text "Vin" at -5.04,3920 h40
  text "J1708+" at -125,3821 h40
  text "J1708-" at -125,3722 h40
  text "J1939H" at -125,3623 h40
  text "Debug Header" at 1257.13,3597.13 h40 r90
  text "J1939L" at -125,3524 h40
  text "GND" at 1327.13,3447.13 h40
  text "GND" at -11.7,3425 h40
  text "1939H" at 1993.73,3227.01 h30
  text "LIN" at 2350.23,3224.01 h30
  text "GND" at 1679.23,3223.01 h30
  text "+12V" at 1845.48,3223.01 h30
  text "1939L" at 2179.98,3223.01 h30
  text "CAN2H" at 1992.73,3164.01 h30
  text "IGN" at 2349.23,3161.01 h30
  text "1708+" at 1678.23,3160.01 h30
  text "1708-" at 1844.48,3160.01 h30
  text "CAN2L" at 2178.98,3160.01 h30
  text "Female HDR" at 502.13,1757.13 h40 r90
  text "Vin" at 2575,550 h40
  text "E1708+" at 2575,451 h40
  text "E1708-" at 2575,352 h40
  text "CAN0H" at 2575,253 h40
  text "CAN0L" at 2575,154 h40
  text "GND" at 2575,55 h40
Bottom Overlay:
  text "E1708-" at 680,4585 h25 r90
  text "1939H" at 900,4585 h30 r90
  text "1708-" at 1005,4585 h30 r90
  text "1708+" at 1120,4585 h30 r90
  text "1939L" at 785,4580 h30 r90
  text "CAN2L" at 556.23,4565.01 h30 r90
  text "IGN" at 455,4525 h30 r90
  text "E1708+" at 685,4255 h30 r90
  text "CAN2H" at 800,4250 h30 r90
  text "+12V" at 1170,4240 h30 r90
  text "+12V" at 409.23,4222 h30 r90
  text "IGN" at 502.23,4222 h30 r90
  text "GND" at 1020.23,4192.01 h30
  text "Truck Cape - The University of Tulsa - J. Daily - May. 2018, Rev 3" at 50,4185 h60 r90
  text "TX" at 1335,3945 h40
  text "Vin" at 402.1,3925 h40
  text "RX" at 1320,3840 h40
  text "J1708+" at 522.06,3826 h40
  text "J1708-" at 515,3735 h40
  text "J1939H" at 520,3610 h40
  text "J1939L" at 522.06,3529 h40
  text "Fits Hammond Mfg. 1455K120 Extruded Aluminum Case" at 2710,3465 h60 r90
  text "GND" at 1412.13,3432.13 h40
  text "GND" at 408.77,3430 h40
  text "1939H" at 2134.69,3225.01 h30
  text "GND" at 1762.19,3223.01 h30
  text "+12V" at 1948.44,3223.01 h30
  text "1939L" at 2305.94,3223.01 h30
  text "GND" at 2422.19,3223.01 h30
  text "CAN2H" at 2135.69,3162.01 h30
  text "1708+" at 1763.19,3160.01 h30
  text "1708-" at 1949.44,3160.01 h30
  text "CAN2L" at 2306.94,3160.01 h30
  text "IGN" at 2419.21,3160.01 h30
  text "GND" at 574.93,1655 h40
  text "Vin" at 2389.93,565 h40
  text "E1708+" at 2389.93,466 h40
  text "E1708-" at 2389.93,367 h40
  text "CAN0H" at 2389.93,268 h40
  text "CAN0L" at 2389.93,169 h40
  text "GND" at 2389.93,70 h40

## Dimensions
1107.13,2972.13 to 1407.13,2972.13 on Mechanical 1
2367.13,1565 to 2563.98,1565 on Mechanical 1
2355,2450 to 2555,2450 on Mechanical 1
1444.44,4724.41 to 1532.13,3931.45 on Mechanical 1
-142.87,4631.31 to 1532.13,4636.71 on Mechanical 1
-49.77,4724.41 to -142.87,143.03 on Mechanical 1
-142.87,143.03 to 101.63,252.13 on Mechanical 1

## Text inside footprints (layer, text, board x,y; h text height)
BeagleBoneBlack1: Top Overlay "TP4" at 828.13,319.63 h40 r270; Top Overlay "TP1" at 497.13,2472.13 h40 r270; Top Overlay "J1-6" at 371.13,2366.63 h40 r270; Top Overlay "J1-1" at 378.13,1609.63 h40 r270; Top Overlay "BAT" at 585.13,624.63 h40 r270; Top Overlay "SENSE" at 402.13,520.63 h40 r270; Top Overlay "GND" at 395.13,842.63 h40 r270; Top Overlay "TS" at 506.83,840.63 h40 r270; Top Overlay "P8" at 2260.13,3039.13 h40 r270; Top Overlay "46" at 2165.13,3098.63 h40 r270; Top Overlay "1" at 2030.13,714.63 h40 r270; Top Overlay "2" at 2166.13,717.63 h40 r270; Top Overlay "46" at 263.13,3099.63 h40 r270; Top Overlay "45" at 143.13,3105.63 h40 r270; Top Overlay "2" at 264.13,717.63 h40 r270; Top Overlay "1" at 150.13,712.63 h40 r270; Top Overlay "BB USB" at 727.13,3356.63 h60 r270; Top Overlay "P9" at 202.13,3149.63 h40 r270; Top Overlay "5V Jack" at 502.13,460.63 h60 r270; Bottom Overlay "TP4" at 828.13,224.03 h40 r270; Bottom Overlay "TP1" at 502.13,2407.13 h40 r270; Bottom Overlay "J1-6" at 382.13,2239.63 h40 r270; Bottom Overlay "J1-1" at 380.13,1496.37 h40 r270; Bottom Overlay "BAT" at 507.13,410.63 h40 r270; Bottom Overlay "SENSE" at 407.13,340.63 h40 r270; Bottom Overlay "GND" at 395.13,748.94 h40 r270; Bottom Overlay "TS" at 510.13,743.63 h40 r270; Bottom Overlay "2" at 2178.13,686.97 h40 r270; Bottom Overlay "1" at 2042.13,689.97 h40 r270; Bottom Overlay "P8" at 1979.13,2949.13 h40 r270; Bottom Overlay "46" at 2142.13,3039.13 h40 r270; Bottom Overlay "P9" at 203.13,3100.63 h40 r270; Bottom Overlay "2" at 275.13,689.63 h40 r270; Bottom Overlay "46" at 267.13,3038.63 h40 r270; Bottom Overlay "1" at 157.13,699.63 h40 r270; Bottom Overlay "45" at 149.13,3038.97 h40 r270
C7: Top Overlay "+" at 2703.98,1292.13 h40 r180; Top Overlay "-" at 2248.98,1292.13 h40 r180; Bottom Overlay "-" at 2323.98,1292.13 h40 r180; Bottom Overlay "+" at 2643.98,1292.13 h40 r180
C8: Top Overlay "+" at 2707.13,877.13 h40 r180; Top Overlay "-" at 2252.13,877.13 h40 r180; Bottom Overlay "-" at 2327.13,877.13 h40 r180; Bottom Overlay "+" at 2647.13,877.13 h40 r180
J10: Top Overlay "1" at 1624.82,3341.61 h60 r180; Top Overlay "6" at 1624.82,3136.61 h60 r180; Top Overlay "Molex 39-30-1100" at 2437.23,3460.01 h50 r180
J15: Top Overlay "D15S33E4GX00LF" at 482.28,4519.6 h50; Bottom Overlay "9" at 368.91,4386.02 h40; Bottom Overlay "1" at 317.28,4276.6 h40; Bottom Overlay "15" at 1230.91,4382.02 h40; Bottom Overlay "8" at 1243.91,4262.02 h40; Mechanical 1 "edge" at 0.91,4664.02 h40; Mechanical 1 "edge" at 1390.91,4664.02 h40
U6: Top Overlay "Vin" at 2688.28,1740.13 h40; Top Overlay "TAB" at 2412.28,2282.13 h40; Top Overlay "GND" at 2417.28,1648.13 h40